# Altium PCB PCB1.PcbDoc
Units mil, origin at the board's own origin, x right, y up, seen from the top; angles counter-clockwise.
Board outline 3707.03 x 1934.16 mil, 2 copper layers (Top Layer, Bottom Layer); 19 components, 22 nets, 70 pads, 13 vias.
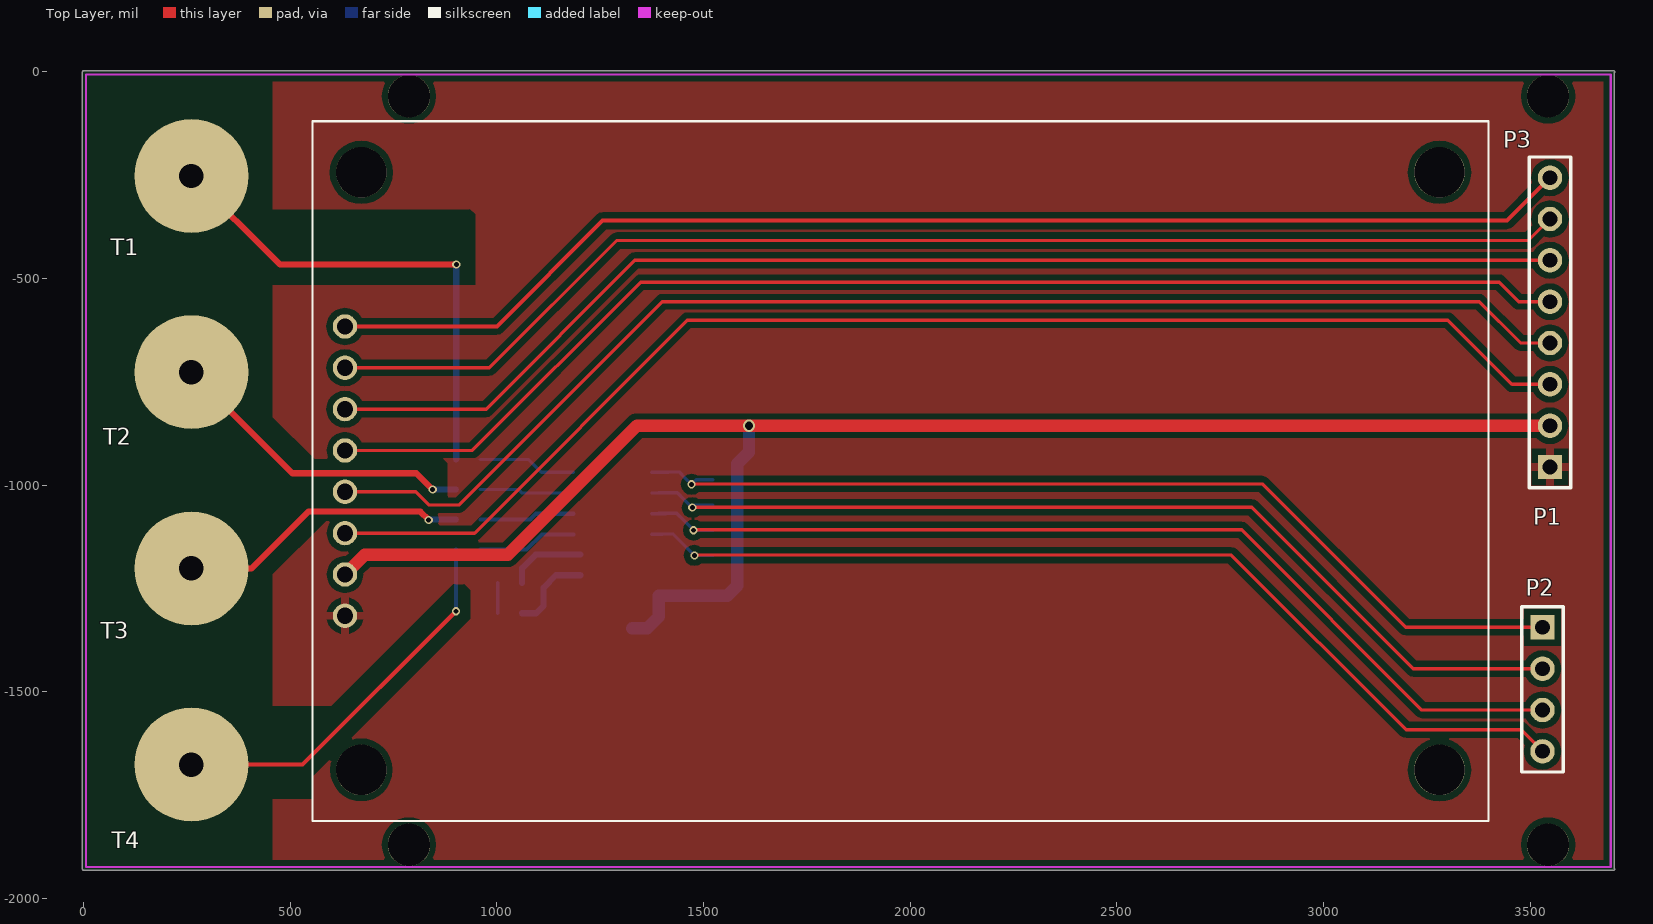
[diagram p0: Top Layer view]
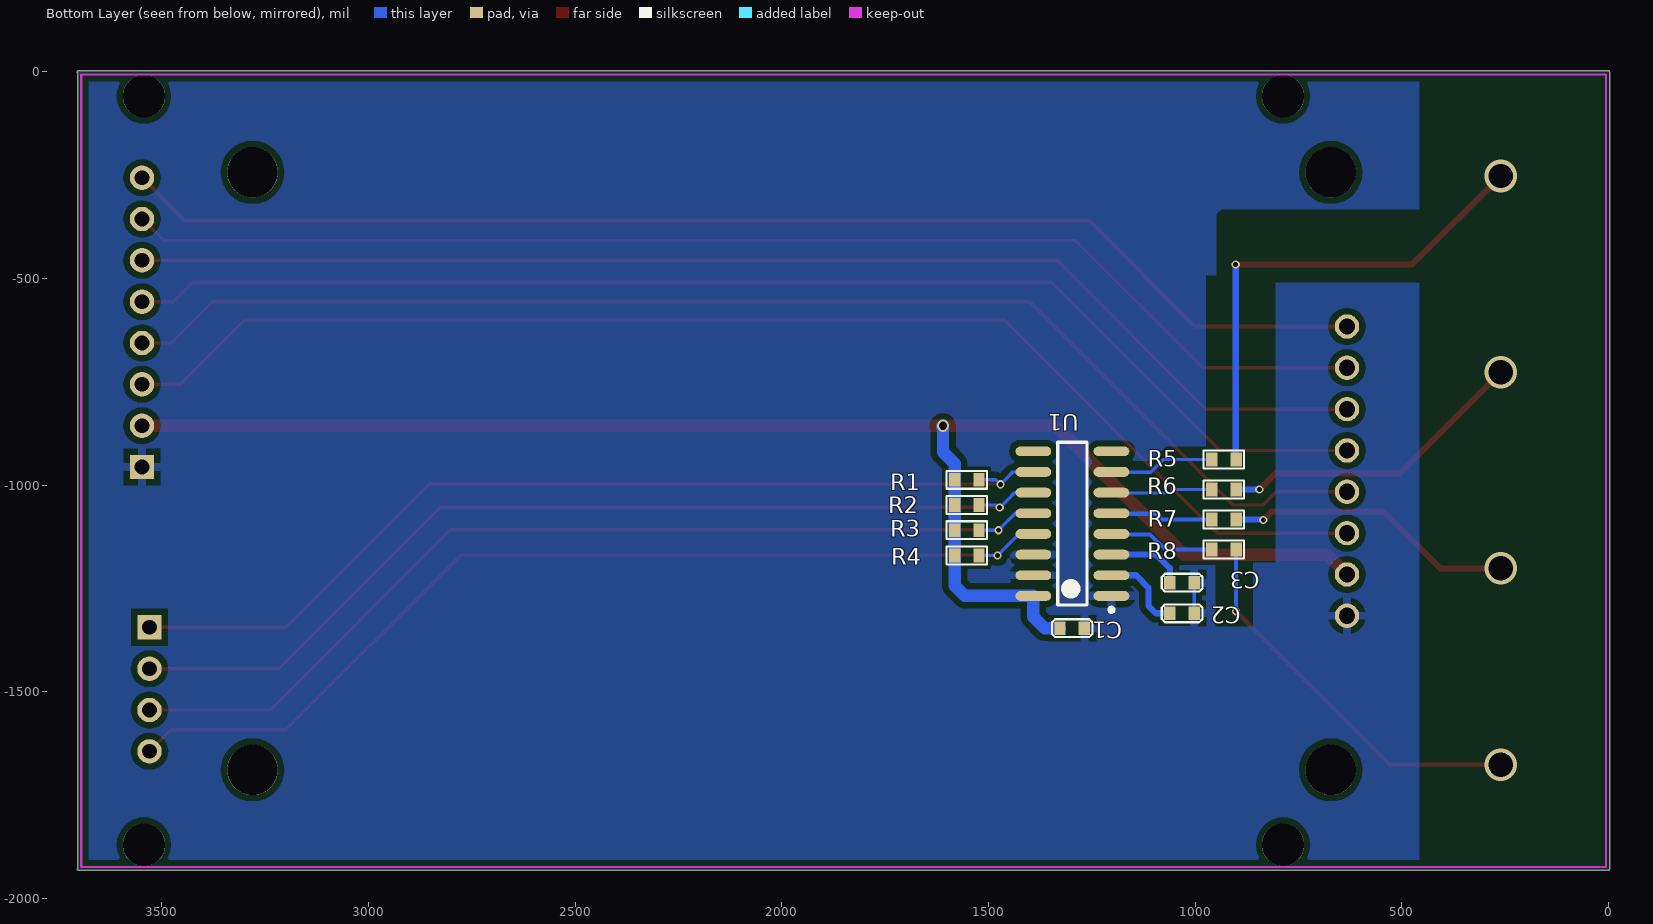
[diagram p1: Bottom Layer view, seen from below]

## Layer stack, top to bottom
Top Layer: signal copper 1.4
Dielectric: dielectric 12.6, FR-4, Dk 4.8
Bottom Layer: signal copper 1.4

## Board outline
-2.51,-1929.13 ccw(c0,-1929.13) 0,-1931.65 3702,-1931.65 ccw(c3702,-1929.13) 3704.52,-1929.13 ccw(c3702,-1929.13) 3703.3,-1926.98 3703.3,-2.15 ccw(c3702,0) 3704.52,0 ccw(c3702,0) 3702,2.51 0,2.51 ccw(c0,0) -2.51,0

## Design rules (kind name [scope] priority, off if disabled: settings)
Clearance Clearance_1 [InPoly And InNet(GND)] p1: gap=15
Clearance [All] p2: gap=5
MinimumSolderMaskSliver [All] p1: minsoldermaskwidth=1
PolygonConnect PolygonConnect_1 [IsVia] p1: connectstyle=Direct reliefconductorwidth=10 reliefentries=4 polygonreliefangle="90 Angle"
PolygonConnect [All] p2: connectstyle=Relief reliefconductorwidth=20 reliefentries=4 polygonreliefangle="90 Angle"
RoutingVias [All] p1: holewidth=28 width=50 viastyle="Through Hole" minholewidth=28 minwidth=50 maxholewidth=28 maxwidth=50
SilkToSilkClearance [All] p1: silktosilkclearance=1
SilkscreenOverComponentPads [All] p1: minsilkscreentomaskgap=1
SolderMaskExpansion [All] p1: expansion=4
Width [All] p1: maxlimit=200 minlimit=6 preferedwidth=10
25 further rules are at their usual default settings.

## Components (designator, comment, footprint, x,y, rotation, side; value= is the part's Value field where it differs from the comment)
C1 "0.1uF" 0603C 1327,-1346 r180 bottom
C2 "4.7nF/10V" 0603C 1002,-1310 r0 bottom
C3 "20pF/10V" 0603C 1002,-1236 r0 bottom
P1 "Header 8" HDR1X8 3548,-956 r90 top
P2 "Header 4" HDR1X4 3530,-1344 r270 top
P3 "Header 8" TFT2.4 632.6,-616 r0 top locked
R1 "3K" 0603R 1582,-987 r180 bottom
R2 "3K" 0603R 1582,-1048 r180 bottom
R3 "3K" 0603R 1582,-1109 r180 bottom
R4 "3K" 0603R 1582,-1170 r180 bottom
R5 "3K" 0603R 901,-938 r0 bottom
R6 "3K" 0603R 901,-1010.67 r0 bottom
R7 "3K" 0603R 901,-1083.33 r0 bottom
R8 "3K" 0603R 901,-1156 r0 bottom
T1 "TP" TOUCH-PAD 261,-252 r0 top
T2 "TP" TOUCH-PAD 261,-726.67 r0 top
T3 "TP" TOUCH-PAD 261,-1201.33 r0 top
T4 "TP" TOUCH-PAD 261,-1676 r0 top
U1 "TC334" SOIC127P600X265-16N 1297,-1093 r0 bottom

## Footprints (in the part's own frame and the unit in brackets; to place one, negate y for a bottom-side part, rotate by r counter-clockwise, add the part's x,y. Pads: shape width x height; smd on the part's side, far side on the other; paste and mask are expansions set on the pad)
0603C [mm]
  rect 0.7x0.85 smd: 1(0,0) 2(1.5,0)
  silkscreen extent -0.5,-0.55 2,0.55
0603R [mm]
  rect 0.7x0.85 smd: 1(0,0) 2(1.5,0)
  silkscreen extent -0.5,-0.55 2,0.55
HDR1X4 [mm] "Connector; Header; 4 Position"
  rect 1.5x1.5 hole 0.9: 1(0,0)
  round 1.5 hole 0.9: 2(2.54,0) 3(5.08,0) 4(7.62,0)
  silkscreen extent -1.27,-1.27 8.89,1.27
HDR1X8 [mm] "Connector; Header; 8 Position"
  rect 1.5x1.5 hole 0.9: 1(0,0)
  round 1.5 hole 0.9: 2(2.54,0) 3(5.08,0) 4(7.62,0) 5(10.16,0) 6(12.7,0) 7(15.24,0) 8(17.78,0)
  silkscreen extent -1.27,-1.27 19.05,1.27
SOIC127P600X265-16N [mm] "SOIC, 16-Leads, Body 10.0x4.0mm (max), Pitch 1.27mm, IPC Medium Density"
  oval 2.2x0.6 smd: 1(-2.4,4.445) 2(-2.4,3.175) 3(-2.4,1.905) 4(-2.4,0.635) 5(-2.4,-0.635) 6(-2.4,-1.905) 7(-2.4,-3.175) 8(-2.4,-4.445) 9(2.4,-4.445) 10(2.4,-3.175) 11(2.4,-1.905) 12(2.4,-0.635) 13(2.4,0.635) 14(2.4,1.905) 15(2.4,3.175) 16(2.4,4.445)
  silkscreen extent -2.52,-5 0.9,5.42, body extent -2,-5 2,5, height 2.65
TFT2.4 [mm]
  round 1.5 hole 1: 1(0,-17.78) 2(0,-15.24) 3(0,-12.7) 4(0,-10.16) 5(0,-7.62) 6(0,-5.08) 7(0,-2.54) 8(0,0)
  round 3.1 hole 3.1: 9(1,-27.25) 9(1,9.47) 9(67.26,-27.25) 9(67.26,9.47)
  silkscreen extent -2,-30.39 70.26,12.61
TOUCH-PAD [mm]
  round 7 smd: 1(0,0)

## Part data
C1 C2 C3: library part Cap, "Capacitor"
P1 P3: "Header, 8-Pin"
P2: "Header, 4-Pin"
R1 R2 R3 R4 R5 R6 R7 R8: library part "Res Semi", "Semiconductor Resistor"

## Free pads (board coordinates)
  round 102.36 hole 102.36 unplated: 2(787.4,-1870.08) 2(787.4,-59.06) 2(3543.31,-1870.08) 2(3543.31,-59.06)

## Via types
v1: diameter 20, hole 12, Top Layer to Bottom Layer, tented both sides, 8 vias
v2: diameter 78.74, hole 59.06, Top Layer to Bottom Layer, tented both sides, 4 vias
v3: diameter 30, hole 20, Top Layer to Bottom Layer, tented both sides, 1 vias

## Nets (pads, with @x,y where several pads share a name; then routed paths per layer and width w, separated by ;. In a path a pad name is that pad's centre, name@x,y a point inside that pad or via, vN(x,y) a via of type N, cw(c..) or ccw(c..) an arc to the next point about the centre after c; other vN are vias at no path point)
BLK: P1.7 P3.7 | length 3064.5
  Top Layer w8: P3.7 982,-716 1290,-408 3496,-408 P1.7
DC: P1.6 P3.6 | length 3064.5
  Top Layer w8: P3.6 974,-816 1334,-456 P1.6
GND: C1.2 C2.1 C3.1 P1.1 P3.1 U1.1 U1.14 U1.15 | length 74
  Bottom Layer w8: C2.1 C3.1
KEY1: P2.1 R1.2 U1.10 | length 2410.1
  Top Layer w8: v1@1471,-997 2852,-997 3199,-1344 P2.1
  Bottom Layer w8: U1.10@1374.49,-969 U1.10@1415,-969 ; U1.10 1441,-968 1456,-983 ; 1443,-970 1456,-983 ; R1.2 1482,-987 v1(1471,-998) 1456,-983
KEY2: P2.2 R2.2 U1.11 | length 2422.1
  Top Layer w8: v1@1472.87,-1053.13 2826.13,-1053.13 3217,-1444 P2.2
  Bottom Layer w8: U1.11@1374.49,-1019 U1.11@1410.73,-1019 ; U1.11 1436.73,-1018 1451.37,-1032.63 ; 1438.73,-1020 1451.37,-1032.63 ; R2.2 1479,-1048 v1(1472.87,-1054.13) 1451.37,-1032.63
KEY3: P2.3 R3.2 U1.12 | length 2435.3
  Top Layer w8: v1@1476,-1108 2802,-1108 3238,-1544 P2.3
  Bottom Layer w8: U1.12@1374.49,-1069 U1.12@1409,-1069 ; U1.12 1435,-1068 1449.58,-1082.58 ; 1437,-1070 1449.58,-1082.58 ; R3.2 v1(1476,-1109) 1449.58,-1082.58
KEY4: P2.4 R4.2 U1.13 | length 2427.3
  Top Layer w8: v1@1478,-1169 2777,-1169 3200,-1592 3478,-1592 P2.4
  Bottom Layer w8: U1.13@1374.49,-1119 U1.13@1400,-1119 ; U1.13 1426,-1118 v1(1478,-1170) R4.2
MISO: P1.8 P3.8 | length 3064.5
  Top Layer w10: P3.8 1000,-616 1256,-360 3444,-360 P1.8
MOSI: P1.4 P3.4 | length 3173.9
  Top Layer w8: P3.4 804,-1016 836,-1048 908.35,-1048 1400.35,-556 3377,-556 3477,-656 P1.4
NetC2_2: C2.2 U1.2 | length 205.3
  Bottom Layer w15: C2.2 1095,-1310 1113,-1292 1113,-1248 1143,-1218 U1.2
NetC3_2: C3.2 U1.3 | length 190.2
  Bottom Layer w15: C3.2 1061.06,-1200.94 1094,-1168 U1.3
NetR5_1: R5.1 T1.1 | length 1202.1
  Top Layer w15: v2(261,-252) 475,-466 v1(902,-466)
  Bottom Layer w15: R5.1 902,-937 v1(902,-466)
NetR5_2: R5.2 U1.7 | length 238.3
  Bottom Layer w8: R5.2 1077,-938 1108,-969 U1.7@1185.51,-969
NetR6_1: R6.1 T2.1 | length 757.6
  Top Layer w15: v2(261,-726.67) 505.33,-971 805,-971 v1@844,-1010
  Bottom Layer w15: v1@844,-1010 v1(844.67,-1010.67) R6.1
NetR6_2: R6.2 U1.6 | length 228.9
  Bottom Layer w8: R6.2 1052.67,-1010.67 1061,-1019 U1.6@1185.51,-1019
NetR7_1: R7.1 T3.1 | length 705.4
  Top Layer w15: v2(261,-1201.33) 406.67,-1201.33 544,-1064 815,-1064 v1(835,-1084)
  Bottom Layer w15: v1(835,-1084) 835.67,-1083.33 R7.1
NetR7_2: R7.2 U1.5 | length 231.4
  Bottom Layer w10: R7.2 1080.67,-1083.33 1095,-1069 U1.5@1185.51,-1069
NetR8_1: R8.1 T4.1 | length 942.7
  Top Layer w10: v2(261,-1676) 490,-1676 530,-1676 v1(901,-1305)
  Bottom Layer w10: v1(901,-1305) R8.1
NetR8_2: R8.2 U1.4 | length 240.8
  Bottom Layer w10: R8.2 1072,-1156 1109,-1119 U1.4@1185.51,-1119
RES: P1.5 P3.5 | length 3103.5
  Top Layer w8: P3.5 941,-916 1348,-509 3425,-509 3472,-556 P1.5
SCK: P1.3 P3.3 | length 3192.9
  Top Layer w8: P3.3 946,-1116 1461,-601 3301,-601 3456,-756 P1.3
VCC_3.3V: C1.1 P1.2 P3.2 R1.1 R2.1 R3.1 R4.1 U1.16 | length 3793.2
  Top Layer w30: P3.2 680.6,-1168 1027,-1168 1339,-856 v3(1610,-856) P1.2
  Bottom Layer w30: C1.1 1364,-1346 1391.49,-1318.51 U1.16 1557,-1268 1582,-1243 R4.1 R3.1 R2.1 R1.1 1582,-948 1610,-920 v3(1610,-856) v3@1612,-858
pads on no net: P3.9 U1.8 U1.9

## Polygon pours and split planes (outlines as drawn)
GND on Top Layer "Mid-Layer 1-No Net" (solid, remove dead copper, pour order 1000): -212,162 -129,79 3854,79 3854,-2153 3782,-2225 3674,-2117 -396,-2117 -396,-177 -111,108
GND on Bottom Layer "Mid-Layer 1-No Net" (solid, remove dead copper, pour order 1001): -83,77 3826,77 3830,81 3830,-2113 83,-2113 -145,-1885 2,-1738 2,77

## Keep-outs
Keep-Out Layer:
  lines w5: 6,-1924 6,-6 3695,-6 3695,-1924 6,-1924

## Other copper
Top Layer:
  pour cut-out: 458,-1216 600,-1074 600,-1064 460,-1064 435,-1089 458,-1112
  pour cut-out: 458,-835.14 558.86,-936 870.32,-936 881.32,-947 881.32,-1024.68 858,-1048 829,-1019 458,-1019
  pour cut-out: 901,-1239 894,-1239 599,-1534 427,-1534 427,-1759 428,-1760 553.86,-1760 553.86,-1706.14 937,-1323 937,-1254 921,-1238 919,-1240 901,-1240
  pour cut-out: 455,-330 458,-333 933,-333 935,-331 949,-345 949,-516 440,-516 396,-472 455,-413
  pour cut-out: 12,-26 78,40 458,40 458,-1929.13 -2.87,-1929.13 -15,-1917 12,-1890
Bottom Layer:
  pour cut-out: 860,-1188 860,-1343 951,-1343 951,-1194 1068,-1194 1122,-1140 1254,-1140 1250.1,-1140 1250.1,-944.9 1139.1,-944.9 896,-1188
  pour cut-out: 1250.1,-941 1106.11,-941 1070.5,-905.39 951,-905.39 951,-1194 1250.1,-1194
  pour cut-out: 805,-492 805,-1187.73 974,-1187.73 974,-492
  pour cut-out: 455,-330 458,-333 933,-333 935,-331 949,-345 949,-510 434,-510 396,-472 455,-413
  pour cut-out: 12,17 458,17 458,-1929.13 -2.87,-1929.13 -15,-1917 12,-1890

## Silkscreen, mask and mechanical layers (free items; w line width, h text height)
Mechanical 1:
  lines w5: 3700.79,-1929.13 3700.79,0 ; 3702,-1929.13 0,-1929.13 0,0 3702,0